# EAGLE board CT_schematic (EAGLE 7.6.0)

Size 100 x 80 mm. Coordinates in mm from the lower left corner, seen from the top.
Outline: 0,0 100,0 100,80 0,80 0,0
Copper layers (1*16): Top 0.035mm / dielectric 1.5mm / Bottom 0.035mm
Design rules "default": minimum track width 10mil, minimum drill 24mil, track to track 8mil, track to pad 8mil, pad to pad 8mil, via to via 8mil, smd to smd 8mil, copper to edge 40mil, drill to drill 8mil, minimum pad ring 10mil, minimum via ring 8mil, stop-mask expansion 4mil, vias tented up to drill 0mil, thermal gap 10mil

## Footprints (pad centres in the part's own frame; a part is rotated, then mirrored left to right if it is on the bottom)
C0603 = smd 0.8 x 0.8: 1 -0.762,0; 2 0.762,0
C0402 = smd 0.5 x 0.5: 1 -0.508,0; 2 0.508,0
C0805 = smd 1.2 x 1.3: 1 -1.016,0; 2 1.016,0
C1206 = smd 1.3 x 1.6: 1 -1.524,0; 2 1.524,0
L0603 = smd 0.8 x 0.8: 1 -0.762,0; 2 0.762,0
DR1040 = smd 1.6 x 3.2: 1 -4.458,0; 2 4.458,0
R0603 = smd 0.8 x 0.8: 1 -0.762,0; 2 0.762,0
LQFP100 = smd 0.3 x 1.2: 1 -6,-7.75; 2 -5.5,-7.75; 3 -5,-7.75; 4 -4.5,-7.75; 5 -4,-7.75; 6 -3.5,-7.75; 7 -3,-7.75; 8 -2.5,-7.75; 9 -2,-7.75; 10 -1.5,-7.75; 11 -1,-7.75; 12 -0.5,-7.75; 13 0,-7.75; 14 0.5,-7.75; 15 1,-7.75; 16 1.5,-7.75; 17 2,-7.75; 18 2.5,-7.75; 19 3,-7.75; 20 3.5,-7.75; 21 4,-7.75; 22 4.5,-7.75; 23 5,-7.75; 24 5.5,-7.75; 25 6,-7.75; 51 6,7.75; 52 5.5,7.75; 53 5,7.75; 54 4.5,7.75; 55 4,7.75; 56 3.5,7.75; 57 3,7.75; 58 2.5,7.75; 59 2,7.75; 60 1.5,7.75; 61 1,7.75; 62 0.5,7.75; 63 0,7.75; 64 -0.5,7.75; 65 -1,7.75; 66 -1.5,7.75; 67 -2,7.75; 68 -2.5,7.75; 69 -3,7.75; 70 -3.5,7.75; 71 -4,7.75; 72 -4.5,7.75; 73 -5,7.75; 74 -5.5,7.75; 75 -6,7.75 | smd 1.2 x 0.3: 26 7.75,-6; 27 7.75,-5.5; 28 7.75,-5; 29 7.75,-4.5; 30 7.75,-4; 31 7.75,-3.5; 32 7.75,-3; 33 7.75,-2.5; 34 7.75,-2; 35 7.75,-1.5; 36 7.75,-1; 37 7.75,-0.5; 38 7.75,0; 39 7.75,0.5; 40 7.75,1; 41 7.75,1.5; 42 7.75,2; 43 7.75,2.5; 44 7.75,3; 45 7.75,3.5; 46 7.75,4; 47 7.75,4.5; 48 7.75,5; 49 7.75,5.5; 50 7.75,6; 76 -7.75,6; 77 -7.75,5.5; 78 -7.75,5; 79 -7.75,4.5; 80 -7.75,4; 81 -7.75,3.5; 82 -7.75,3; 83 -7.75,2.5; 84 -7.75,2; 85 -7.75,1.5; 86 -7.75,1; 87 -7.75,0.5; 88 -7.75,0; 89 -7.75,-0.5; 90 -7.75,-1; 91 -7.75,-1.5; 92 -7.75,-2; 93 -7.75,-2.5; 94 -7.75,-3; 95 -7.75,-3.5; 96 -7.75,-4; 97 -7.75,-4.5; 98 -7.75,-5; 99 -7.75,-5.5; 100 -7.75,-6
SOIC-8 = smd 1.6 x 0.6: 1 -2.7,1.905 | smd 1.55 x 0.6: 2 -2.7,0.635; 3 -2.7,-0.635; 4 -2.7,-1.905; 5 2.7,-1.905; 6 2.7,-0.635; 7 2.7,0.635; 8 2.7,1.905
TDFN-8/6MM = smd 0.3 x 0.75: 1 0,0; 2 0.5,0; 3 1,0; 4 1.5,0; 5 1.5,3; 6 1,3; 7 0.5,3; 8 0,3
182-009-MALE = drill 1.194 pad 1.524 octagon: 1 -5.537,10.923; 2 -2.769,10.923; 3 0,10.923; 4 2.769,10.923; 5 5.537,10.923; 6 -4.153,8.08; 7 -1.384,8.08; 8 1.384,8.08; 9 4.153,8.08 | hole 3.048: -12.446,9.501; 12.446,9.501
SSOP-28 = smd 1.5 x 0.4: 1 -3.625,4.225; 2 -3.625,3.575; 3 -3.625,2.925; 4 -3.625,2.275; 5 -3.625,1.625; 6 -3.625,0.975; 7 -3.625,0.325; 8 -3.625,-0.325; 9 -3.625,-0.975; 10 -3.625,-1.625; 11 -3.625,-2.275; 12 -3.625,-2.925; 13 -3.625,-3.575; 14 -3.625,-4.225; 15 3.625,-4.225; 16 3.625,-3.575; 17 3.625,-2.925; 18 3.625,-2.275; 19 3.625,-1.625; 20 3.625,-0.975; 21 3.625,-0.325; 22 3.625,0.325; 23 3.625,0.975; 24 3.625,1.625; 25 3.625,2.275; 26 3.625,2.925; 27 3.625,3.575; 28 3.625,4.225
FCI_10118193-0001LF = smd 0.4 x 1.35: 1 -1.3,2.675; 2 -0.65,2.675; 3 0,2.675; 4 0.65,2.675; 5 1.3,2.675 | smd 1.6 x 1.4: 6 -3.2,2.45; 7 3.2,2.45 | smd 1.9 x 1.9: 8 -1.2,0; 9 1.2,0 | hole 0.5: -3.3,0; 3.3,0
SOT143B = smd 1 x 0.7: 1 -0.75,-1 | smd 0.6 x 0.7: 2 0.95,-1; 3 0.95,1; 4 -0.95,1
ABLS-25.000MHZ-B2F-T = smd 5.6 x 2.8: 1 -3.81,0; 2 5.69,0
ASEK = smd 1.4 x 1: 1 -1.1,-0.8; 2 1.1,-0.8; 3 1.1,0.8; 4 -1.1,0.8
TSOT-23-5 = smd 1.3 x 0.62: 1 -1.31,0.95; 2 -1.31,0; 3 -1.31,-0.95; 4 1.31,-0.95; 5 1.31,0.95
DFN8_2X3MC = smd 0.813 x 0.305: 1 -1.398,0.75; 2 -1.398,0.25; 3 -1.398,-0.25; 4 -1.398,-0.75; 5 1.398,-0.75; 6 1.398,-0.25; 7 1.398,0.25; 8 1.398,0.75 | smd 1.753 x 1.549: 9 0,0
JST-2-SMD = smd 1 x 4.6: 1 -1,-3.7; 2 1,-3.7 | smd 1.6 x 3.4: NC1 -3.4,1.5; NC2 3.4,1.5
SON-6 = smd 0.55 x 0.3: 1 -0.355,0.5 | smd 0.52 x 0.3: 2 -0.37,0; 3 -0.37,-0.5; 4 0.37,-0.5; 5 0.37,0; 6 0.37,0.5
SW_4-1437565-2 = smd 1.4 x 2.1: 1 -2.23,4.55; 2 -2.23,-4.55; 3 2.23,4.55; 4 2.23,-4.55
LGM67K-G1J2-24-Z = smd 0.8 x 1.4: A -2,0; C 0,0
NC7SZ125M5X = smd 1.3 x 0.7: 1 -1.3,0.95; 2 -1.3,0; 3 -1.3,-0.95; 4 1.3,-0.95; 5 1.3,0.95
DUMMY_PACKAGE_156 = drill 0.3: 1 0,-1; 2 1.5,-1; 3 3,-1

## Placement (x,y rotation side)
C1  1e-06  [C0603]  -45.72,86.36 0 top  (outside the outline)
C2  1e-07  [C0603]  -49.53,86.36 0 top  (outside the outline)
C3  1e-07  [C0603]  -53.34,86.36 0 top  (outside the outline)
C4  1e-07  [C0603]  -57.15,86.36 0 top  (outside the outline)
C5  1e-07  [C0603]  -60.96,86.36 0 top  (outside the outline)
C6  1e-07  [C0603]  -64.77,86.36 0 top  (outside the outline)
C7  1e-07  [C0603]  -68.58,86.36 0 top  (outside the outline)
C8  4.7e-06  [C0603]  -34.29,86.36 0 top  (outside the outline)
C9  2.2e-06  [C0603]  -38.1,86.36 0 top  (outside the outline)
C10  2.2e-06  [C0603]  -41.91,86.36 0 top  (outside the outline)
C11  1e-08  [C0603]  -72.39,86.36 0 top  (outside the outline)
C12  1e-06  [C0603]  -76.2,86.36 0 top  (outside the outline)
C13  1e-11  [C0402]  -45.72,91.44 0 top  (outside the outline)
C14  1e-11  [C0402]  -49.53,91.44 0 top  (outside the outline)
C15  1e-06  [C0603]  -80.01,86.36 0 top  (outside the outline)
C16  1e-08  [C0402]  -53.34,91.44 0 top  (outside the outline)
C17  1e-08  [C0402]  -57.15,91.44 0 top  (outside the outline)
C18  1e-07  [C0402]  -60.96,91.44 0 top  (outside the outline)
C19  1e-07  [C0402]  -64.77,91.44 0 top  (outside the outline)
C20  1e-07  [C0402]  -68.58,91.44 0 top  (outside the outline)
C21  1e-07  [C0402]  -72.39,91.44 0 top  (outside the outline)
C22  1e-07  [C0402]  -76.2,91.44 0 top  (outside the outline)
C23  1e-07  [C0402]  -80.01,91.44 0 top  (outside the outline)
C24  1e-08  [C0402]  -15.24,96.52 0 top  (outside the outline)
C25  1e-05  [C0805]  -21.59,80.01 0 top  (outside the outline)
C26  1e-05  [C0805]  -26.67,80.01 0 top  (outside the outline)
C27  1e-07  [C0402]  -19.05,96.52 0 top  (outside the outline)
C28  1e-05  [C1206]  -68.58,72.39 0 top  (outside the outline)
C29  1e-05  [C1206]  -74.93,72.39 0 top  (outside the outline)
C30  1e-08  [C0402]  -22.86,96.52 0 top  (outside the outline)
F1  240.0  [L0603]  -15.24,91.44 0 top  (outside the outline)
I1  2.5e-06  [DR1040]  -49.53,49.53 0 top  (outside the outline)
R2  1000.0  [R0603]  -19.05,91.44 0 top  (outside the outline)
R4  4700.0  [R0603]  -22.86,91.44 0 top  (outside the outline)
R5  2200.0  [R0603]  -26.67,91.44 0 top  (outside the outline)
R6  2200.0  [R0603]  -30.48,91.44 0 top  (outside the outline)
R7  10000.0  [R0603]  -69.85,80.01 0 top  (outside the outline)
R8  10000.0  [R0603]  -74.93,80.01 0 top  (outside the outline)
R9  10000.0  [R0603]  -80.01,80.01 0 top  (outside the outline)
R10  10000.0  [R0603]  -15.24,86.36 0 top  (outside the outline)
R11  120.0  [R0603]  -34.29,91.44 0 top  (outside the outline)
R12  470000.0  [R0603]  -44.45,80.01 0 top  (outside the outline)
R13  100000.0  [R0603]  -49.53,80.01 0 top  (outside the outline)
R14  220000.0  [R0603]  -54.61,80.01 0 top  (outside the outline)
R15  1000000.0  [R0603]  -39.37,80.01 0 top  (outside the outline)
R16  10000.0  [R0603]  -20.32,86.36 0 top  (outside the outline)
R17  10000.0  [R0603]  -25.4,86.36 0 top  (outside the outline)
R18  9100.0  [R0603]  -38.1,91.44 0 top  (outside the outline)
R19  680000.0  [R0603]  -59.69,80.01 0 top  (outside the outline)
R20  120000.0  [R0603]  -64.77,80.01 0 top  (outside the outline)
R21  2000.0  [R0603]  -41.91,91.44 0 top  (outside the outline)
R22  10000.0  [R0603]  -30.48,86.36 0 top  (outside the outline)
U1  STM32F205VET7  [LQFP100]  -63.5,31.75 0 top  (outside the outline)
U2  AT25040B-SSHL-T  [SOIC-8]  -39.37,64.77 0 top  (outside the outline)
U3  24AA00T-I/MNY  [TDFN-8/6MM]  -24.13,63.5 0 top  (outside the outline)
U4  SN65HVD230D  [SOIC-8]  -53.34,64.77 0 top  (outside the outline)
U5  182-009-113R531  [182-009-MALE]  -36.83,6.35 0 top  (outside the outline)
U6  ST3241EBPR  [SSOP-28]  -19.05,52.07 0 top  (outside the outline)
U7  182-009-113R531  [182-009-MALE]  -36.83,27.94 0 top  (outside the outline)
U8  10118193-0001LF  [FCI_10118193-0001LF]  -63.5,63.5 0 top  (outside the outline)
U9  prtr5v0u2ax  [SOT143B]  -35.56,96.52 0 top  (outside the outline)
U10  ABLS-25.000MHZ-B2F-T  [ABLS-25.000MHZ-B2F-T]  -45.72,73.66 0 top  (outside the outline)
U11  ASEK-32.768KHz-ECST  [ASEK]  -29.21,73.66 0 top  (outside the outline)
U12  ltc3406es5  [TSOT-23-5]  -31.75,80.01 0 top  (outside the outline)
U13  MCP73831T-2ACI/MC  [DFN8_2X3MC]  -50.8,95.25 0 top  (outside the outline)
U14  S2B-PH-SM4-TB(LF)(SN)  [JST-2-SMD]  -64.77,50.8 0 top  (outside the outline)
U15  TPS3895ADRYR  [SON-6]  -44.45,95.25 0 top  (outside the outline)
U16  4-1437565-2  [SW_4-1437565-2]  -39.37,49.53 0 top  (outside the outline)
U17  Q65110A2395  [LGM67K-G1J2-24-Z]  -57.15,72.39 0 top  (outside the outline)
U18  nc7sz125m5x  [NC7SZ125M5X]  -15.24,80.01 0 top  (outside the outline)
U19  Dummy  [DUMMY_PACKAGE_156]  -41.91,96.52 0 top  (outside the outline)

## Library data of the parts
C1-C30 F1 I1 R2 R4-R22 U1-U19 = circuit_tree

## Nets
CLK_CRYSTAL_U1_12: C13.1 U1.12 U10.1
CLK_CRYSTAL_U1_13: C14.1 U1.13 U10.2
CLK_U1_8: U1.8 U11.3
GND: C1.2 C2.2 C3.2 C4.2 C5.2 C6.2 C7.2 C8.2 C9.2 C10.2 C11.2 C12.2 C13.2 C14.2 C15.2 C16.2 C17.2 C18.2 C19.2 C22.2 C23.2 C24.2 C25.2 C26.1 C26.2 C27.2 C28.2 C29.2 C30.2 R2.2 R7.2 R12.2 R14.2 R18.2 R20.2 R21.2 U1.10 U1.20 U1.27 U1.70 U1.74 U2.4 U3.4 U4.2 U5.5 U6.23 U6.25 U7.5 U8.5 U8.6 U8.7 U8.8 U8.9 U9.1 U11.2 U12.2 U13.6 U13.9 U14.2 U15.2 U17.C U18.1 U18.3 U19.1
INPUT_USBPOWER_5V: C15.1 C28.1 R22.2 U1.68 U8.1 U9.4 U13.1 U13.2
NET_U1_14: R4.1 U1.14 U18.4
NET_U1_22: C11.1 C12.1 F1.1 U1.21 U1.22
NET_U1_49: C9.1 U1.49
NET_U1_73: C10.1 U1.73
NET_U1_92: R5.1 U1.92 U3.6
NET_U1_93: R6.1 U1.93 U3.5
NET_U1_94: R7.1 U1.94
NET_U1_97: U17.A
NET_U1_98: U16.3 U16.4
NET_U2_3: R8.1 U2.3
NET_U2_7: R10.1 U2.7
NET_U4_6: R11.2 U4.6
NET_U4_8: R12.1 U4.8
NET_U5_2: R11.2 U4.6 U5.2
NET_U5_3: R11.1 U4.7 U5.3
NET_U6_1: C21.1 U6.1
NET_U6_2: C21.2 U6.2
NET_U6_3: C23.1 U6.3
NET_U6_22: R13.1 U6.22
NET_U6_24: C20.2 U6.24
NET_U6_27: C22.1 U6.27
NET_U6_28: C20.1 U6.28
NET_U7_2: U6.4 U7.2
NET_U7_3: U6.9 U7.3
NET_U7_7: U6.5 U7.7
NET_U7_8: U6.10 U7.8
NET_U12_1: U12.1
NET_U12_3: I1.1 U12.3
NET_U12_5: R14.1 R15.1 U12.5
NET_U12_ATNET_3: I1.2 R15.2
NET_U13_5: R22.1 U13.5
NET_U13_8: R21.1 U13.8
NET_U15_1: R17.1 R18.1 U15.1
NET_U15_3: R19.2 R20.1 U15.3
NET_U15_4: R16.1 U15.4 U18.2
NET_U16_1: R2.1 U16.1 U16.2
PROC_CAN1_RX: U1.81 U4.4
PROC_CAN1_TX: U1.82 U4.1
PROC_SPI1_MISO: U1.31 U2.2
PROC_SPI1_MOSI: U1.32 U2.5
PROC_SPI1_NSS: R9.1 U1.29 U2.1
PROC_SPI1_SCK: U1.30 U2.6
PROC_TIM1_CH2: U1.42 U19.2
PROC_TIM1_CH4: U1.45 U19.3
PROC_UART4_RX: U1.24 U6.19
PROC_UART4_TX: U1.23 U6.14
PROC_USB_OTG_FS_DM: U1.70 U8.2 U9.3
PROC_USB_OTG_FS_DP: U1.71 U8.3 U9.2
VCC_S1_3V7: C25.1 C29.1 U12.4 U13.3 U13.4 U14.1
VCC_TIER1_3V3: C1.1 C2.1 C3.1 C4.1 C5.1 C6.1 C7.1 C8.1 C16.1 C17.1 C18.1 C19.1 C24.1 C26.2 C27.1 C30.1 F1.2 I1.2 R4.2 R5.2 R6.2 R8.2 R9.2 R10.2 R13.2 R15.2 R16.2 R17.2 R19.1 U1.6 U1.11 U1.19 U1.28 U1.50 U1.75 U1.100 U2.8 U3.8 U4.3 U6.26 U11.4 U15.6 U18.5

## Tracks (layer width: path | path; a pad name or v marks a point on that pad's centre or on a via)
CLK_CRYSTAL_U1_12  (2 unrouted)
CLK_CRYSTAL_U1_13  (2 unrouted)
CLK_U1_8  (1 unrouted)
GND  (63 unrouted)
INPUT_USBPOWER_5V  (7 unrouted)
NET_U1_14  (2 unrouted)
NET_U1_22  (4 unrouted)
NET_U1_49  (1 unrouted)
NET_U1_73  (1 unrouted)
NET_U1_92  (2 unrouted)
NET_U1_93  (2 unrouted)
NET_U1_94  (1 unrouted)
NET_U1_98  (1 unrouted)
NET_U2_3  (1 unrouted)
NET_U2_7  (1 unrouted)
NET_U4_6  (1 unrouted)
NET_U4_8  (1 unrouted)
NET_U5_2  (2 unrouted)
NET_U5_3  (2 unrouted)
NET_U6_1  (1 unrouted)
NET_U6_2  (1 unrouted)
NET_U6_3  (1 unrouted)
NET_U6_22  (1 unrouted)
NET_U6_24  (1 unrouted)
NET_U6_27  (1 unrouted)
NET_U6_28  (1 unrouted)
NET_U7_2  (1 unrouted)
NET_U7_3  (1 unrouted)
NET_U7_7  (1 unrouted)
NET_U7_8  (1 unrouted)
NET_U12_3  (1 unrouted)
NET_U12_5  (2 unrouted)
NET_U12_ATNET_3  (1 unrouted)
NET_U13_5  (1 unrouted)
NET_U13_8  (1 unrouted)
NET_U15_1  (2 unrouted)
NET_U15_3  (2 unrouted)
NET_U15_4  (2 unrouted)
NET_U16_1  (2 unrouted)
PROC_CAN1_RX  (1 unrouted)
PROC_CAN1_TX  (1 unrouted)
PROC_SPI1_MISO  (1 unrouted)
PROC_SPI1_MOSI  (1 unrouted)
PROC_SPI1_NSS  (2 unrouted)
PROC_SPI1_SCK  (1 unrouted)
PROC_TIM1_CH2  (1 unrouted)
PROC_TIM1_CH4  (1 unrouted)
PROC_UART4_RX  (1 unrouted)
PROC_UART4_TX  (1 unrouted)
PROC_USB_OTG_FS_DM  (2 unrouted)
PROC_USB_OTG_FS_DP  (2 unrouted)
VCC_S1_3V7  (5 unrouted)
VCC_TIER1_3V3  (42 unrouted)